# EAGLE board gorazoptere_v1 (EAGLE 4.15)

Size 90 x 90 mm. Coordinates in mm from the lower left corner, seen from the top.
Outline: circle at 45,45 radius 45
Copper layers (1*16): Top 0.035mm / dielectric 1.5mm / Bottom 0.035mm
Design rules "default": minimum track width 10mil, minimum drill 24mil, track to track 8mil, track to pad 8mil, pad to pad 8mil, via to via 8mil, smd to smd 8mil, copper to edge 40mil, drill to drill 8mil, minimum pad ring 10mil, minimum via ring 8mil, stop-mask expansion 4mil, vias tented up to drill 0mil, thermal gap 10mil
Holes 3 mm at 74,74 16,74 16,16 74,16 62.5,63 62.5,27 27.5,27 27.5,63

## Footprints (pad centres in the part's own frame; a part is rotated, then mirrored left to right if it is on the bottom)
53047-04 = drill 0.5 pad 0.698 long: 1 1.875,0; 2 0.625,0; 3 -0.625,0; 4 -1.875,0
SMC_C = smd 2.4 x 2.4: + -2.5,0; - 2.5,0
C0402K = smd 0.925 x 0.74: 1 -0.6,0; 2 0.6,0
SOT23 = smd 1 x 1.4: 1 -0.95,-1.1; 2 0.95,-1.1; 3 0,1.1
DO-214BA = smd 1.85 x 1.68: A 1.87,0 | smd 1.32 x 1.68: C -2.12,0
SO08 = smd 0.6 x 2.2: 1 -1.905,-2.6; 2 -0.635,-2.6; 3 0.635,-2.6; 4 1.905,-2.6; 5 1.905,2.6; 6 0.635,2.6; 7 -0.635,2.6; 8 -1.905,2.6
TQFP64-AEB = smd 1.194 x 0.559: 1 -7.7,6; 2 -7.7,5.2; 3 -7.7,4.4; 4 -7.7,3.6; 5 -7.7,2.8; 6 -7.7,2; 7 -7.7,1.2; 8 -7.7,0.4; 9 -7.7,-0.4; 10 -7.7,-1.2; 11 -7.7,-2; 12 -7.7,-2.8; 13 -7.7,-3.6; 14 -7.7,-4.4; 15 -7.7,-5.2; 16 -7.7,-6; 33 7.7,-6; 34 7.7,-5.2; 35 7.7,-4.4; 36 7.7,-3.6; 37 7.7,-2.8; 38 7.7,-2; 39 7.7,-1.2; 40 7.7,-0.4; 41 7.7,0.4; 42 7.7,1.2; 43 7.7,2; 44 7.7,2.8; 45 7.7,3.6; 46 7.7,4.4; 47 7.7,5.2; 48 7.7,6 | smd 0.559 x 1.194: 17 -6,-7.7; 18 -5.2,-7.7; 19 -4.4,-7.7; 20 -3.6,-7.7; 21 -2.8,-7.7; 22 -2,-7.7; 23 -1.2,-7.7; 24 -0.4,-7.7; 25 0.4,-7.7; 26 1.2,-7.7; 27 2,-7.7; 28 2.8,-7.7; 29 3.6,-7.7; 30 4.4,-7.7; 31 5.2,-7.7; 32 6,-7.7; 49 6,7.7; 50 5.2,7.7; 51 4.4,7.7; 52 3.6,7.7; 53 2.8,7.7; 54 2,7.7; 55 1.2,7.7; 56 0.4,7.7; 57 -0.4,7.7; 58 -1.2,7.7; 59 -2,7.7; 60 -2.8,7.7; 61 -3.6,7.7; 62 -4.4,7.7; 63 -5.2,7.7; 64 -6,7.7
TSSOP16 = smd 0.305 x 0.991: 1 -2.275,-2.918; 2 -1.625,-2.918; 3 -0.975,-2.918; 4 -0.325,-2.918; 5 0.325,-2.918; 6 0.975,-2.918; 7 1.625,-2.918; 8 2.275,-2.918; 9 2.275,2.918; 10 1.625,2.918; 11 0.975,2.918; 12 0.325,2.918; 13 -0.325,2.918; 14 -0.975,2.918; 15 -1.625,2.918; 16 -2.275,2.918
HC49U-V = drill 0.813 round: 1 -2.413,0; 2 2.413,0
SC59-BEC = smd 1 x 1.4: B -0.95,-1.2; C 0,1.2; E 0.95,-1.2
R0603 = smd 1 x 1.1: 1 -0.85,0; 2 0.85,0
R0402 = smd 0.7 x 0.9: 1 -0.65,0; 2 0.65,0
R1005 = smd 0.7 x 0.9: 1 -0.65,0; 2 0.65,0
53047-06 = drill 0.5 pad 0.698 long: 1 3.125,0; 2 1.875,0; 3 0.625,0; 4 -0.625,0; 5 -1.875,0; 6 -3.125,0
TO252 = smd 1.6 x 2.997: 1 -2.261,-6.198; 3 2.21,-6.198 | smd 4.826 x 4.191: 4 0,2.083
DF17_20DS = smd 0.25 x 1: P$1 -2.25,2.65; P$2 -1.75,2.65; P$3 -1.25,2.65; P$4 -0.75,2.65; P$5 -0.25,2.65; P$6 0.25,2.65; P$7 0.75,2.65; P$8 1.25,2.65; P$9 1.75,2.65; P$10 2.25,2.65; P$11 2.25,-2.65; P$12 1.75,-2.65; P$13 1.25,-2.65; P$14 0.75,-2.65; P$15 0.25,-2.65; P$16 -0.25,-2.65; P$17 -0.75,-2.65; P$18 -1.25,-2.65; P$19 -1.75,-2.65; P$20 -2.25,-2.65 | smd 1.4 x 2.1: P$21 -4.5,0; P$22 4.5,0 | hole 0.6: 3.5,-1.9; -3.5,-1.9
QFP-32 = smd 0.4 x 2.2: 1 -2.4,-4.65; 2 -1.6,-4.65; 3 -0.8,-4.65; 4 0,-4.65; 5 0.8,-4.65; 6 1.6,-4.65; 7 2.4,-4.65; 8 3.2,-4.65; 17 3.2,5.45; 18 2.4,5.45; 19 1.6,5.45; 20 0.8,5.45; 21 0,5.45; 22 -0.8,5.45; 23 -1.6,5.45; 24 -2.4,5.45 | smd 2.2 x 0.4: 9 5.45,-2.4; 10 5.45,-1.6; 11 5.45,-0.8; 12 5.45,0; 13 5.45,0.8; 14 5.45,1.6; 15 5.45,2.4; 16 5.45,3.2; 25 -4.65,3.2; 26 -4.65,2.4; 27 -4.65,1.6; 28 -4.65,0.8; 29 -4.65,0; 30 -4.65,-0.8; 31 -4.65,-1.6; 32 -4.65,-2.4
MICRO_CRYSTAL = smd 0.9 x 3.2: P$1 -1.5,0; P$2 0,0; P$3 1.5,0
XBEE = drill 0.6 long: P$1 -11,9; P$2 -11,7; P$3 -11,5; P$4 -11,3; P$5 -11,1; P$6 -11,-1; P$7 -11,-3; P$8 -11,-5; P$9 -11,-7; P$10 -11,-9; P$11 11,-9; P$12 11,-7; P$13 11,-5; P$14 11,-3; P$15 11,-1; P$16 11,1; P$17 11,3; P$18 11,5; P$19 11,7; P$20 11,9
GUMDF12 = smd 1.6 x 0.3: 1 -1.8,-7.25; 2 -1.8,-6.75; 3 -1.8,-6.25; 4 -1.8,-5.75; 5 -1.8,-5.25; 6 -1.8,-4.75; 7 -1.8,-4.25; 8 -1.8,-3.75; 9 -1.8,-3.25; 10 -1.8,-2.75; 11 -1.8,-2.25; 12 -1.8,-1.75; 13 -1.8,-1.25; 14 -1.8,-0.75; 15 -1.8,-0.25; 16 -1.8,0.25; 17 -1.8,0.75; 18 -1.8,1.25; 19 -1.8,1.75; 20 -1.8,2.25; 21 -1.8,2.75; 22 -1.8,3.25; 23 -1.8,3.75; 24 -1.8,4.25; 25 -1.8,4.75; 26 -1.8,5.25; 27 -1.8,5.75; 28 -1.8,6.25; 29 -1.8,6.75; 30 -1.8,7.25; 31 1.8,7.25; 32 1.8,6.75; 33 1.8,6.25; 34 1.8,5.75; 35 1.8,5.25; 36 1.8,4.75; 37 1.8,4.25; 38 1.8,3.75; 39 1.8,3.25; 40 1.8,2.75; 41 1.8,2.25; 42 1.8,1.75; 43 1.8,1.25; 44 1.8,0.75; 45 1.8,0.25; 46 1.8,-0.25; 47 1.8,-0.75; 48 1.8,-1.25; 49 1.8,-1.75; 50 1.8,-2.25; 51 1.8,-2.75; 52 1.8,-3.25; 53 1.8,-3.75; 54 1.8,-4.25; 55 1.8,-4.75; 56 1.8,-5.25; 57 1.8,-5.75; 58 1.8,-6.25; 59 1.8,-6.75; 60 1.8,-7.25 | hole 0.61: -1.5,8.3; -1.5,-8.3 | hole 1.422: -12.25,-8; 5.35,9.5
SQFP-S-10X10-64 = smd 0.3 x 1.6: 1 -3.75,-5.6; 2 -3.25,-5.6; 3 -2.75,-5.6; 4 -2.25,-5.6; 5 -1.75,-5.6; 6 -1.25,-5.6; 7 -0.75,-5.6; 8 -0.25,-5.6; 9 0.25,-5.6; 10 0.75,-5.6; 11 1.25,-5.6; 12 1.75,-5.6; 13 2.25,-5.6; 14 2.75,-5.6; 15 3.25,-5.6; 16 3.75,-5.6; 33 3.75,5.6; 34 3.25,5.6; 35 2.75,5.6; 36 2.25,5.6; 37 1.75,5.6; 38 1.25,5.6; 39 0.75,5.6; 40 0.25,5.6; 41 -0.25,5.6; 42 -0.75,5.6; 43 -1.25,5.6; 44 -1.75,5.6; 45 -2.25,5.6; 46 -2.75,5.6; 47 -3.25,5.6; 48 -3.75,5.6 | smd 1.6 x 0.3: 17 5.6,-3.75; 18 5.6,-3.25; 19 5.6,-2.75; 20 5.6,-2.25; 21 5.6,-1.75; 22 5.6,-1.25; 23 5.6,-0.75; 24 5.6,-0.25; 25 5.6,0.25; 26 5.6,0.75; 27 5.6,1.25; 28 5.6,1.75; 29 5.6,2.25; 30 5.6,2.75; 31 5.6,3.25; 32 5.6,3.75; 49 -5.6,3.75; 50 -5.6,3.25; 51 -5.6,2.75; 52 -5.6,2.25; 53 -5.6,1.75; 54 -5.6,1.25; 55 -5.6,0.75; 56 -5.6,0.25; 57 -5.6,-0.25; 58 -5.6,-0.75; 59 -5.6,-1.25; 60 -5.6,-1.75; 61 -5.6,-2.25; 62 -5.6,-2.75; 63 -5.6,-3.25; 64 -5.6,-3.75
CTS_CRYSTAL = smd 1.2 x 0.9: P$1 -1.85,-1.1; P$2 1.85,-1.1; P$3 1.85,1.1; P$4 -1.85,1.1
SOIC8 = smd 0.6 x 2.2: 1 -1.905,-2.6; 2 -0.635,-2.6; 3 0.635,-2.6; 4 1.905,-2.6; 5 1.905,2.6; 6 0.635,2.6; 7 -0.635,2.6; 8 -1.905,2.6
2POL254 = drill 1.2 long: 1 -1.27,0; 2 1.27,0
SPB4 = drill 0.813 long: 1 -3.048,0; 2 -1.016,0; 3 1.016,0; 4 3.048,0
32005-201 = smd 3.1 x 0.5: 1 3,1.6; 2 3,0.8; 3 3,0; 4 3,-0.8; 5 3,-1.6 | smd 2.5 x 2: M1 -3,-4.45; M2 -3,4.45 | smd 3.3 x 2: M3 2.9,4.45; M4 2.9,-4.45 | hole 0.9: 0,2.2; 0,-2.2

## Placement (x,y rotation side)
3DMG  [53047-04]  69.42,60.91 270 top
C1  [SMC_C]  27,80.22 0 bottom
C2  100nF  [C0402K]  52.02,59.9 0 bottom
C3  [SMC_C]  27,69.04 0 bottom
C4  100nF  [C0402K]  27,66.37 0 bottom
C5  100nF  [C0402K]  37.93,59.01 0 bottom
C6  100nF  [C0402K]  37.93,57.87 0 bottom
C7  100nF  [C0402K]  37.93,56.72 0 bottom
C8  100nF  [C0402K]  65.74,58.37 90 bottom
C9  470nF  [C0402K]  65.74,55.71 270 bottom
C10  470nF  [C0402K]  55.96,59.14 270 bottom
C11  470nF  [C0402K]  55.83,55.58 90 bottom
C12  18pF  [C0402K]  57.61,34.12 270 bottom
C13  18pF  [C0402K]  59.77,34.12 90 bottom
C14  100nF  [C0402K]  36.91,31.32 180 bottom
C15  15pF  [C0402K]  35.51,33.1 0 bottom
C16  15pF  [C0402K]  32.59,33.1 180 bottom
C17  100nF  [C0402K]  25.35,82.88 0 bottom
C18  18pF  [C0402K]  98.12,14.3 0 top  (outside the outline)
C19  18pF  [C0402K]  101.3,14.3 0 top  (outside the outline)
C20  27pF  [C0402K]  101.55,12.4 0 top  (outside the outline)
C21  27pF  [C0402K]  82,13.8 90 top
C22  18pF  [C0402K]  80.09,13.67 90 top
C23  18pF  [C0402K]  101.55,9.99 0 top  (outside the outline)
C24  18pF  [C0402K]  98.12,12.27 0 top  (outside the outline)
C25  18pF  [C0402K]  98.25,9.86 0 top  (outside the outline)
C26  18pF  [C0402K]  98.12,7.45 0 top  (outside the outline)
C27  18pF  [C0402K]  101.68,7.45 0 top  (outside the outline)
C28  100nF  [C0402K]  98,4.78 0 top  (outside the outline)
D1  BAV199  [SOT23]  55.83,68.41 0 bottom
D2  BAV199  [SOT23]  49.48,68.41 0 bottom
D3  BAV199  [SOT23]  43.13,68.41 0 bottom
D4  BAV199  [SOT23]  36.78,68.41 0 bottom
D5  [DO-214BA]  54.56,82.38 180 bottom
D6  [DO-214BA]  48.21,82.38 180 bottom
D7  [DO-214BA]  41.86,82.38 180 bottom
D8  [DO-214BA]  35.51,82.38 180 bottom
FET_1  IRF7809  [SO08]  54.56,76.66 0 bottom
FET_2  IRF7809  [SO08]  48.21,76.66 0 bottom
FET_3  IRF7809  [SO08]  41.86,76.66 0 bottom
FET_4  IRF7809  [SO08]  35.51,76.66 0 bottom
IC1  MEGA128-A  [TQFP64-AEB]  44.99,56.45 270 bottom
IC2  MAX3221CUE  [TSSOP16]  60.66,57.1 270 bottom
Q1  6MHz  [HC49U-V]  85.81,12.91 90 top
Q2  DDTA143  [SC59-BEC]  64.72,35.39 0 bottom
R1  100R  [R0603]  52.66,70.95 90 bottom
R2  100R  [R0603]  46.31,70.95 90 bottom
R3  100R  [R0603]  39.96,70.95 90 bottom
R4  100R  [R0603]  33.61,70.95 90 bottom
R5  10k  [R0603]  55.83,71.58 0 bottom
R6  10k  [R0603]  49.48,71.58 0 bottom
R7  10k  [R0603]  43.13,71.58 0 bottom
R8  10k  [R0603]  36.78,71.58 0 bottom
R9  1.5K  [R0402]  101.68,4.78 0 top  (outside the outline)
R10  27R  [R0402]  101.68,2.62 0 top  (outside the outline)
R11  27R  [R0402]  84.53,4.78 0 top
R12  1.5K  [R0402]  87.71,4.78 0 top
R13  10K  [R1005]  52.02,61.04 0 bottom
R14  27R  [R0402]  91.27,2.62 0 top
R15  33R  [R1005]  57.61,37.04 90 bottom
R16  33R  [R1005]  61.55,37.04 90 bottom
R17  1.5K  [R1005]  59.77,37.04 90 bottom
R18  10K  [R1005]  36.78,30.05 0 bottom
R19  10K  [R1005]  44.66,23.83 270 bottom
R20  27R  [R0402]  91.27,4.78 0 top
R21  15K  [R0402]  94.57,2.62 0 top  (outside the outline)
R22  15K  [R0402]  98,2.62 0 top  (outside the outline)
R23  27R  [R0402]  101.68,0.46 0 top  (outside the outline)
R24  27R  [R0402]  81.11,0.46 0 top
R25  15K  [R0402]  81.11,4.91 0 top
R26  15K  [R0402]  91.27,0.46 0 top
R27  27R  [R0402]  81.11,2.75 0 top
R28  27R  [R0402]  94.57,0.46 0 top  (outside the outline)
R29  15K  [R0402]  94.57,4.78 0 top  (outside the outline)
R30  15K  [R0402]  98,0.46 0 top  (outside the outline)
R31  10K  [R0402]  87.71,0.46 0 top
R32  10K  [R0402]  87.71,2.62 0 top
R33  15K  [R0402]  84.53,2.62 0 top
R34  10K  [R0402]  78.19,4.91 0 top
R35  1K  [R0402]  78.19,2.75 0 top
R36  1.5K  [R0402]  84.53,0.46 0 top
RC_RX  [53047-06]  16.59,63.96 0 top
U$1  L4941SMD  [TO252]  23.32,74.63 270 bottom
U$2  DF17_DS20  [DF17_20DS]  30.43,54.56 270 top
U$3  DF17_DS20  [DF17_20DS]  67.9,45.55 90 top
U$4  TUSB2036OK  [QFP-32]  95.2,23.45 0 top
U$5  MICRO_RESO  [MICRO_CRYSTAL]  52.78,56.85 90 bottom
U$6  XBEEPRO  [XBEE]  45.04,13.29 180 top
U$7  BASIXGUMSTIX  [GUMDF12]  77.8,45.04 180 bottom
U$8  LPC2148  [SQFP-S-10X10-64]  44.91,32.08 180 bottom
U$10  CRYSTAL_CTS  [CTS_CRYSTAL]  34.12,35.64 0 bottom
U$11  TPS1100  [SOIC8]  93.04,11.89 0 top
X1  [2POL254]  54.56,86.19 0 bottom
X1_  SPB4  [SPB4]  108.92,13.29 90 top  (outside the outline)
X2  [2POL254]  48.21,86.19 0 bottom
X2_  SPB4  [SPB4]  109.3,24.97 90 top  (outside the outline)
X3  [2POL254]  41.86,86.19 0 bottom
X3_  SPB4  [SPB4]  109.05,2.62 90 top  (outside the outline)
X4  [2POL254]  35.51,86.19 0 bottom
X5  MINI-USB-SCHIELD-32005-201  [32005-201]  78.69,27.51 180 top
X8  [53047-04]  62.18,11 270 top

## Library data of the parts
3DMG RC_RX X8 = con-molex
C1-C28 R1-R36 = rcl
D1-D8 = diode
FET_1-FET_4 U$2-U$6 U$8 U$10 U$11 = paparazzi
IC1 = atmel
IC2 = maxim
Q1 = crystal
Q2 = transistor-pnp
U$1 = bko
U$7 = gumstix
X1-X4 = con-phoenix-254
X1_ X2_ X3_ = con-hirschmann
X5 = con-cypressindustries

## Nets
+3V3: Q2.E R18.1 R19.2 R34.2 U$6.P$1 U$8.6 U$8.18 U$8.25 U$8.42 U$8.50 U$11.1 U$11.2 U$11.3 X3_.1 X8.2
+3V3/USB: R31.1 R36.2 U$4.3 U$4.8 U$4.25 U$4.26 U$11.5 U$11.6 U$11.7 U$11.8
+5V: C3.+ C4.1 C5.1 C6.1 C7.1 D1.2 D2.2 D3.2 D4.2 IC1.21 IC1.52 IC1.64 IC2.15 R13.1 U$1.3
+UB: 3DMG.2 C1.+ C17.1 D5.C D6.C D7.C D8.C U$1.1 X1.2 X2.2 X3.2 X4.2
D+: R10.1 X5.3
D-: R11.1 X5.2
GND: 3DMG.1 C1.- C2.1 C3.- C4.2 C5.2 C6.2 C7.2 C10.2 C11.2 C12.2 C13.2 C14.1 C15.2 C16.2 C17.2 C18.2 C19.2 C20.1 C21.1 C22.2 C23.2 C24.2 C25.2 C26.2 C27.2 C28.1 D1.1 D2.1 D3.1 D4.1 FET_1.1 FET_1.2 FET_1.3 FET_2.1 FET_2.2 FET_2.3 FET_3.1 FET_3.2 FET_3.3 FET_4.1 FET_4.2 FET_4.3 IC1.22 IC1.53 IC1.63 IC2.14 R5.1 R6.1 R7.1 R8.1 R21.1 R22.1 R25.1 R26.1 R29.1 R30.1 R33.1 U$1.4 U$4.6 U$4.7 U$4.21 U$4.22 U$4.23 U$4.24 U$4.28 U$4.31 U$5.P$2 U$6.P$10 U$7.1 U$7.7 U$7.31 U$7.42 U$7.60 U$8.23 U$8.43 U$8.51 X1_.2 X2_.2 X3_.2 X5.5 X8.1
GPS_RX: U$8.19 X8.3
GPS_TX: U$8.21 X8.4
ID: R35.2 X5.4
IMU_RX: IC1.28 IC2.11
IMU_TX: IC1.27 IC2.9
LPC_USB_CONNECT: Q2.B U$8.17
LPC_USB_D+: C12.1 R15.2 R17.2 U$8.10
LPC_USB_D-: C13.1 R16.2 U$8.11
LPC_VBUS: U$8.58
N$1: 3DMG.3 IC2.13
N$2: 3DMG.4 IC2.8
N$3: IC1.23 U$5.P$3
N$4: IC1.24 U$5.P$1
N$5: U$2.P$1
N$6: U$2.P$2
N$7: U$2.P$3
N$8: C8.2 IC2.2
N$9: FET_1.4 R1.2 R5.2
N$10: FET_4.4 R4.2 R8.2
N$11: FET_3.4 R3.2 R7.2
N$12: FET_2.4 R2.2 R6.2
N$13: D5.A FET_1.5 FET_1.6 FET_1.7 FET_1.8 X1.1
N$14: D6.A FET_2.5 FET_2.6 FET_2.7 FET_2.8 X2.1
N$15: D7.A FET_3.5 FET_3.6 FET_3.7 FET_3.8 X3.1
N$16: D8.A FET_4.5 FET_4.6 FET_4.7 FET_4.8 X4.1
N$17: U$2.P$4
N$18: U$2.P$5
N$19: C8.1 IC2.4
N$20: C9.2 IC2.6
N$21: C9.1 IC2.5
N$22: U$8.37
N$23: C11.1 IC2.7
N$24: C10.1 IC2.3
N$25: Q2.C R17.1
N$26: C14.2 R18.2 U$8.57
N$27: C16.1 U$8.61 U$10.P$3
N$28: C15.1 U$8.62 U$10.P$1
N$29: R19.1 U$8.41
N$30: U$2.P$6
N$31: U$2.P$7
N$32: U$2.P$8
N$33: U$2.P$9
N$34: U$2.P$10
N$35: U$2.P$11
N$36: U$2.P$12
N$37: U$2.P$13
N$38: U$2.P$14
N$39: U$2.P$15
N$40: U$2.P$16
N$41: U$2.P$17
N$42: U$2.P$18
N$43: U$2.P$19
N$44: U$2.P$20
N$45: U$3.P$1
N$46: U$3.P$2
N$47: U$3.P$3
N$48: U$3.P$4
N$49: U$3.P$5
N$50: U$3.P$6
N$51: U$3.P$7
N$52: U$3.P$8
N$53: U$3.P$9
N$54: U$3.P$10
N$55: U$3.P$11
N$56: U$3.P$12
N$57: U$3.P$13
N$58: U$3.P$14
N$59: U$3.P$15
N$60: U$3.P$16
N$61: U$3.P$17
N$62: U$3.P$18
N$63: U$3.P$19
N$64: U$3.P$20
N$65: RC_RX.1
N$66: RC_RX.2
N$67: RC_RX.3
N$68: RC_RX.4
N$69: RC_RX.5
N$70: RC_RX.6
N$71: C19.1 R9.1 R10.2 U$4.1
N$72: C18.1 R11.2 U$4.2
N$73: R9.2 U$4.27
N$74: C21.2 Q1.2 U$4.30
N$75: R12.2 U$4.29
N$76: C20.2 Q1.1 R12.1
N$77: C22.1 R14.1 U$4.12
N$78: R14.2 R21.2 X1_.4
N$79: R20.2 R22.2 X1_.3
N$80: C23.1 R20.1 U$4.11
N$81: C24.1 R23.1 U$4.16
N$82: R23.2 R25.2 X2_.4
N$83: R24.2 R26.2 X2_.3
N$84: C25.1 R24.1 U$4.15
N$85: C26.1 R27.1 U$4.20
N$86: R27.2 R29.2 X3_.4
N$87: R28.2 R30.2 X3_.3
N$88: C27.1 R28.1 U$4.19
N$89: R31.2 U$4.10 U$4.14 U$4.18
N$90: R32.1 R33.2 X1_.1 X2_.1
N$91: C28.2 R36.1 U$4.4
N$92: R34.1 R35.1 U$11.4
PWM0: D1.3 IC1.15 R1.1
PWM1: D2.3 IC1.7 R2.1
PWM2: D3.3 IC1.6 R3.1
PWM3: D4.3 IC1.5 R4.1
RESET_M128: C2.2 IC1.20 R13.2
USB+: R15.1
USB-: R16.1
V_BATT: U$7.28 U$7.29 U$7.30
VBAT: U$8.49
VBUS: R32.2 X5.1
VDDA3: U$8.7
VSSA: U$8.59
XBEE_CTS: U$6.P$12
XBEE_DTR: U$6.P$9
XBEE_RESET: U$6.P$5
XBEE_RXD: U$6.P$3 U$8.33
XBEE_TXD: U$6.P$2 U$8.34

## Tracks (layer width: path | path; a pad name or v marks a point on that pad's centre or on a via)
+3V3  (14 unrouted)
+3V3/USB  (9 unrouted)
+5V  (14 unrouted)
+UB  (11 unrouted)
D+  (1 unrouted)
D-  (1 unrouted)
GND  (81 unrouted)
GPS_RX  (1 unrouted)
GPS_TX  (1 unrouted)
ID  (1 unrouted)
IMU_RX  (1 unrouted)
IMU_TX  (1 unrouted)
LPC_USB_CONNECT  (1 unrouted)
LPC_USB_D+  (3 unrouted)
LPC_USB_D-  (2 unrouted)
N$1  (1 unrouted)
N$2  (1 unrouted)
N$3  (1 unrouted)
N$4  (1 unrouted)
N$8  (1 unrouted)
N$9  (2 unrouted)
N$10  (2 unrouted)
N$11  (2 unrouted)
N$12  (2 unrouted)
N$13  (5 unrouted)
N$14  (5 unrouted)
N$15  (5 unrouted)
N$16  (5 unrouted)
N$19  (1 unrouted)
N$20  (1 unrouted)
N$21  (1 unrouted)
N$23  (1 unrouted)
N$24  (1 unrouted)
N$25  (1 unrouted)
N$26  (2 unrouted)
N$27  (2 unrouted)
N$28  (2 unrouted)
N$29  (1 unrouted)
N$71  (3 unrouted)
N$72  (2 unrouted)
N$73  (1 unrouted)
N$74  (2 unrouted)
N$75  (1 unrouted)
N$76  (2 unrouted)
N$77  (2 unrouted)
N$78  (2 unrouted)
N$79  (2 unrouted)
N$80  (2 unrouted)
N$81  (2 unrouted)
N$82  (2 unrouted)
N$83  (2 unrouted)
N$84  (2 unrouted)
N$85  (2 unrouted)
N$86  (2 unrouted)
N$87  (2 unrouted)
N$88  (2 unrouted)
N$89  (3 unrouted)
N$90  (3 unrouted)
N$91  (2 unrouted)
N$92  (2 unrouted)
PWM0  (2 unrouted)
PWM1  (2 unrouted)
PWM2  (2 unrouted)
PWM3  (2 unrouted)
RESET_M128  (2 unrouted)
V_BATT  (2 unrouted)
VBUS  (1 unrouted)
XBEE_RXD  (1 unrouted)
XBEE_TXD  (1 unrouted)